# Altium PCB CO2_Metar_PCB.PcbDoc
Units mil, origin at the board's own origin, x right, y up, seen from the top; angles counter-clockwise.
Board outline 3150 x 1100 mil, 4 copper layers (Top Layer, GND, 3.3V, Bottom Layer), stack 30.634 mil thick; 40 components, 32 nets, 207 pads, 28 vias.
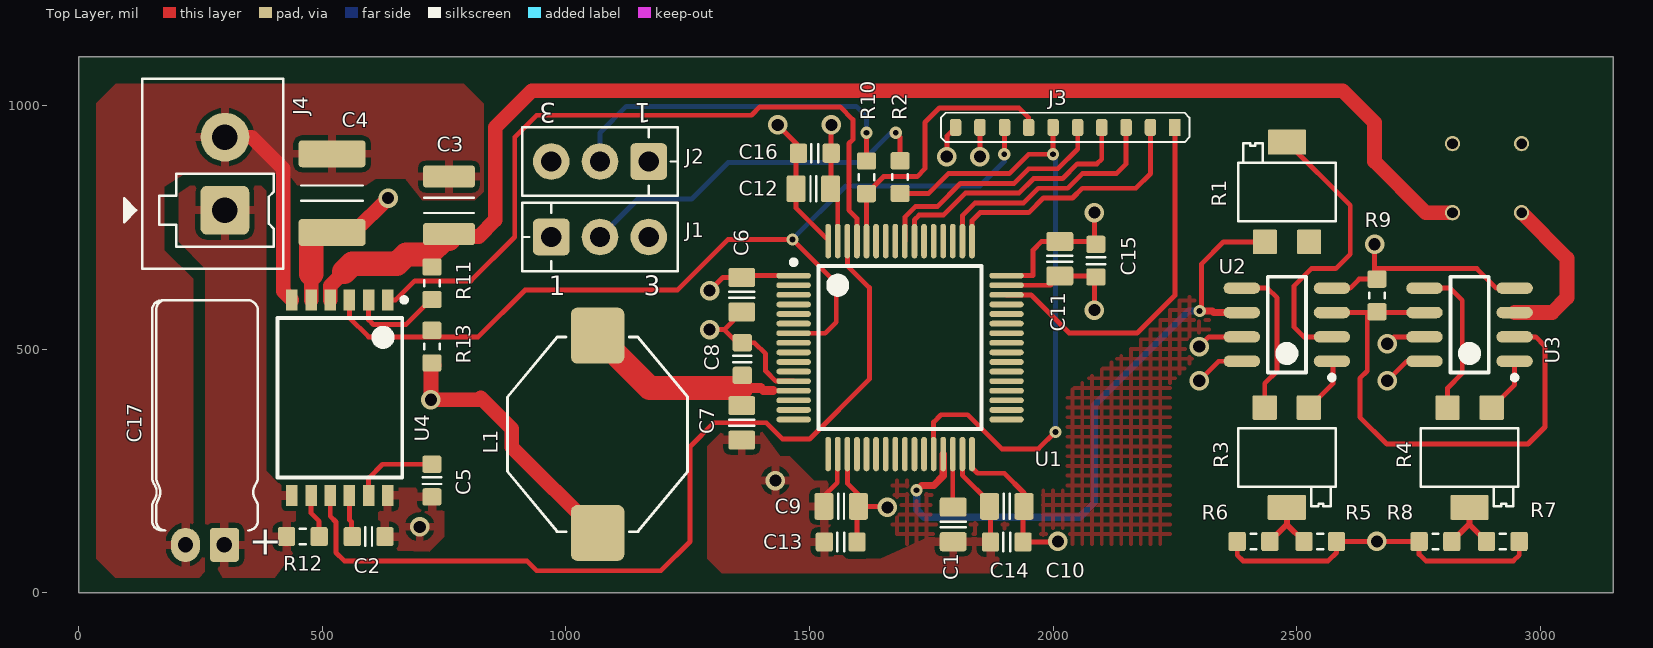
[diagram p0: Top Layer view]
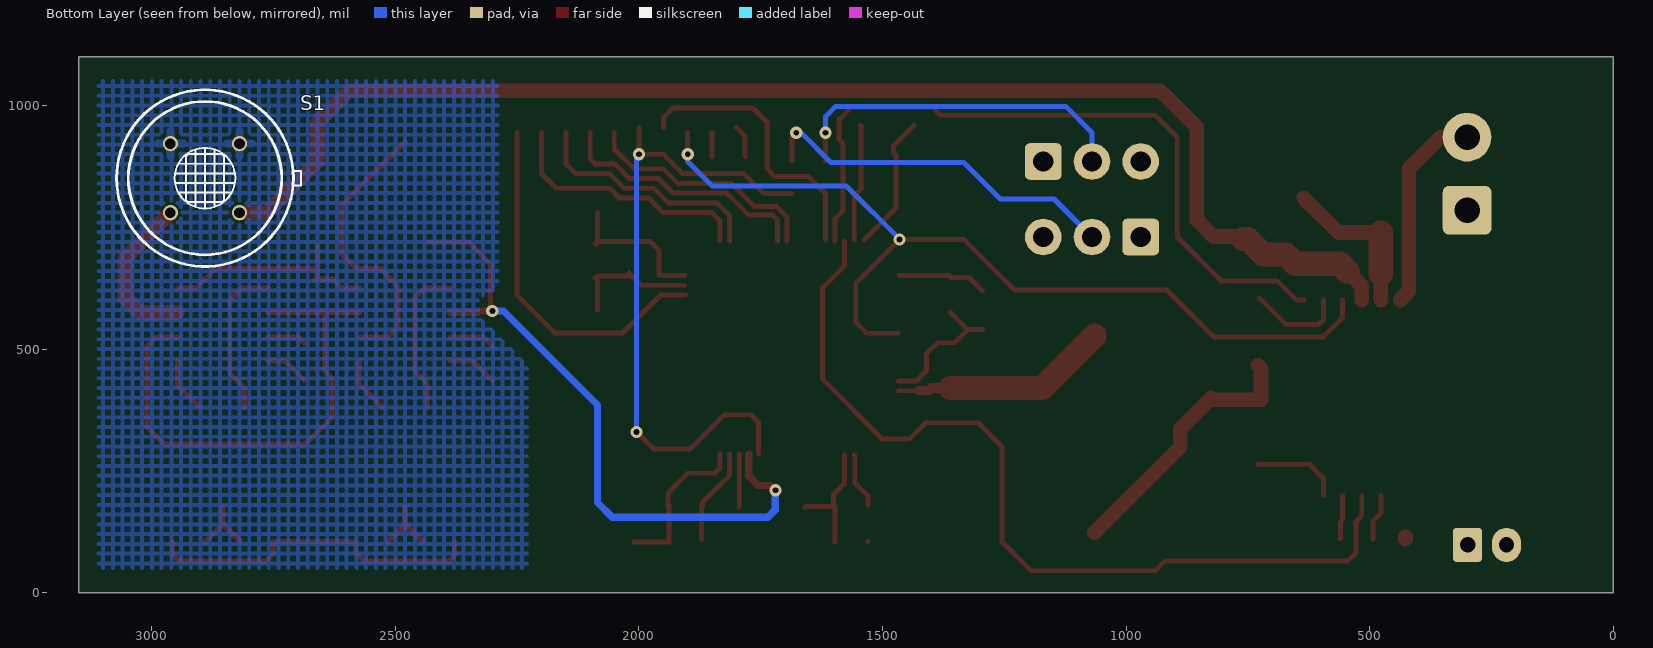
[diagram p1: Bottom Layer view, seen from below]
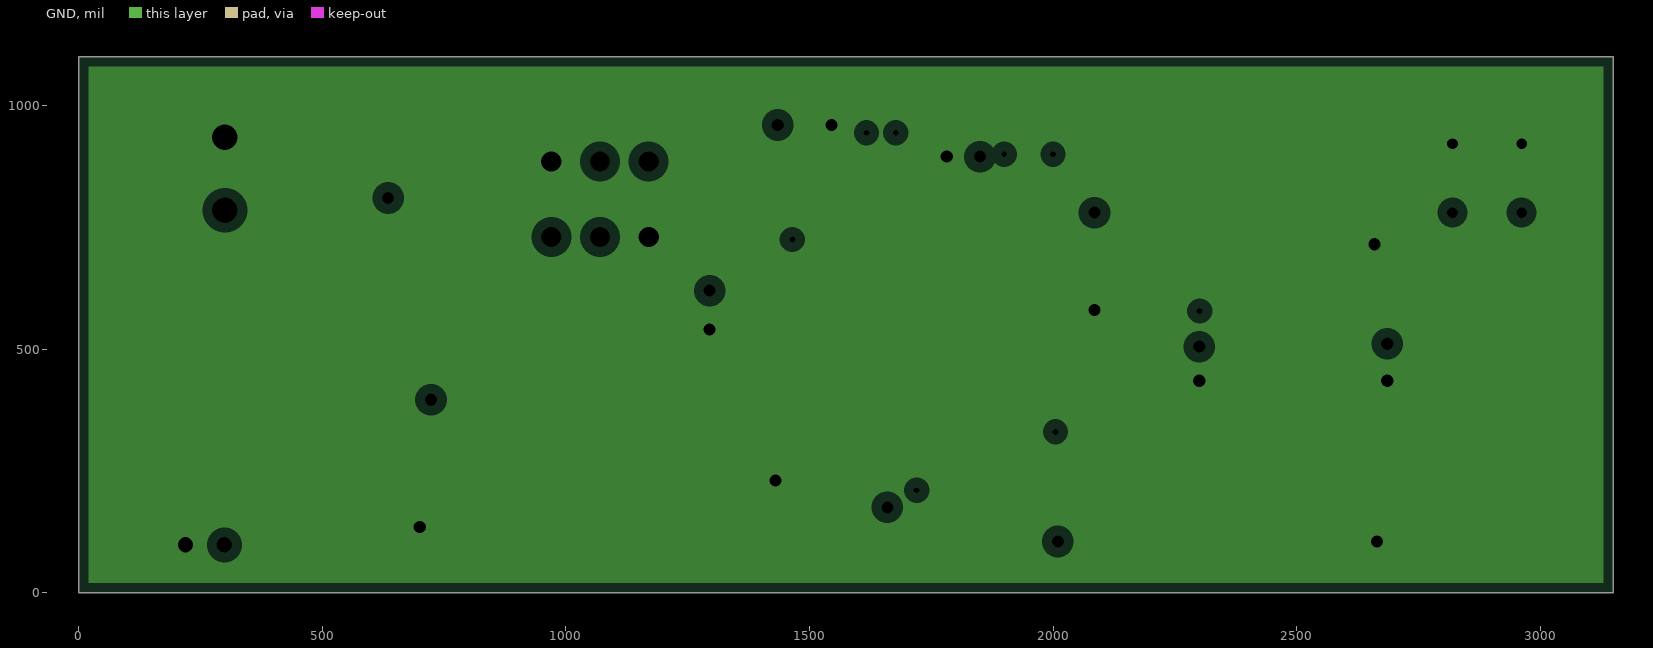
[diagram p2: GND, clearances drawn from the general rule]
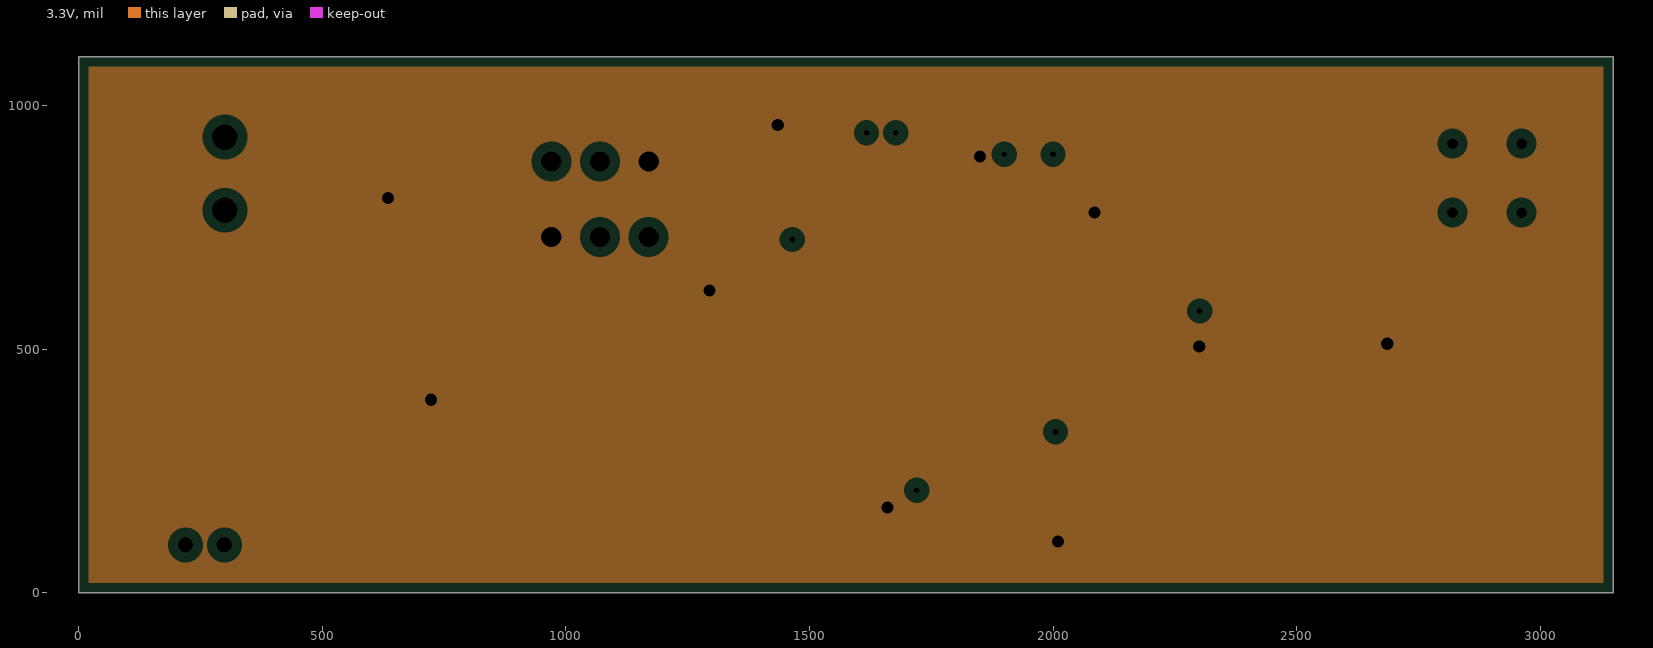
[diagram p3: 3.3V, clearances drawn from the general rule]
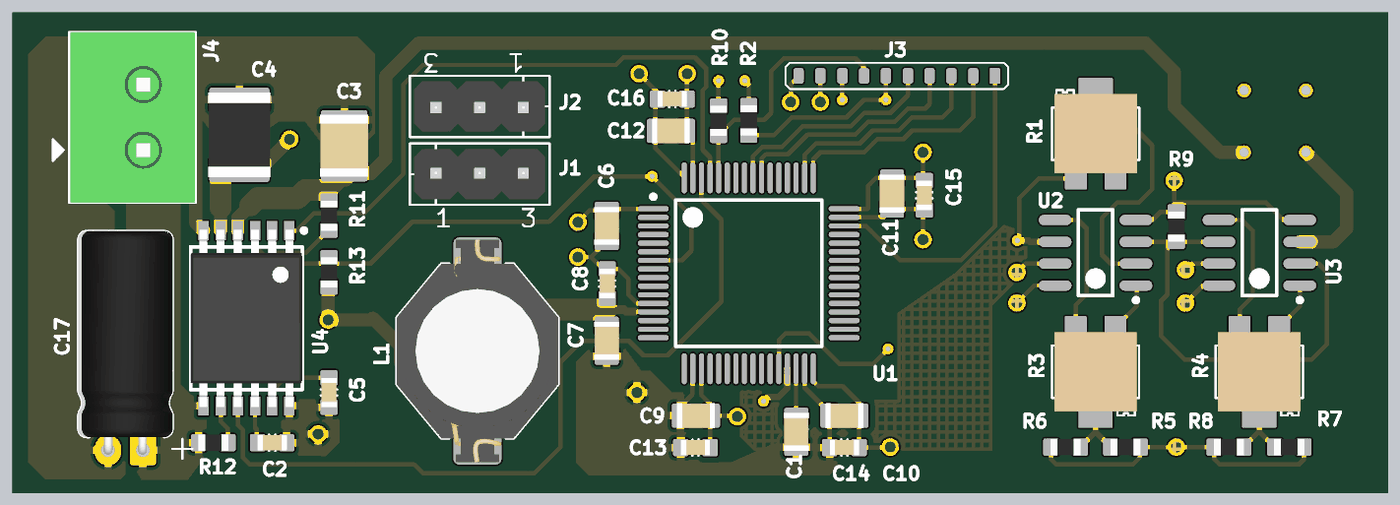
[diagram p4: 3D render of the assembled board from above, using the file's embedded part models]

## Layer stack, top to bottom
Top Solder: solder mask 0.4, Solder Resist, Dk 3.5
Top Layer: signal copper 1.4
Dielectric 1: core 10, FR-4, Dk 4.2
GND: plane copper 1.417, net GND
Dielectric 3: prepreg 5, Dk 4.2
3.3V: plane copper 1.417, net 3.3V
Dielectric 2: core 10, Dk 4.2
Bottom Layer: signal copper 1.4
Bottom Solder: solder mask 0.4, Solder Resist, Dk 3.5

## Board outline
0,0 0,1100 3150,1100 3150,0

## Design rules (kind name [scope] priority, off if disabled: settings)
Clearance [All] p1: gap=5 ignorepadtopadclearanceinfootprint=TRUE except(15: SMDPad-Fill SMDPad-Poly SMDPad-Region)
MinimumSolderMaskSliver [All] p1: minsoldermaskwidth=7
PlaneClearance [All] p1: clearance=20
PlaneConnect [All] p1: planeconnectstyle=Relief reliefexpansion=20 reliefentries=4 reliefconductorwidth=10 reliefairgap=10
PolygonConnect [All] p1: connectstyle=Relief reliefconductorwidth=17 reliefentries=4 polygonreliefangle="90 Angle" airgapwidth=10
RoutingVias [All] p1: holewidth=12 width=25 viastyle="Through Hole" minholewidth=11 minwidth=23 maxholewidth=25 maxwidth=55
SilkToSilkClearance [All] p1: silktosilkclearance=5
SilkToSolderMaskClearance [IsPad] p1: minsilkscreentomaskgap=5 clearancetoexposedcopper=TRUE
SolderMaskExpansion [All] p1: expansion=4
UnpouredPolygon [All] p1: allowunpoured=TRUE allowshelved=TRUE
Width [All] p1: maxlimit=50 minlimit=5 preferedwidth=10 minimp=50.000000 maximp=50.000000 favimp=50.000000
24 further rules are at their usual default settings.

## Components (designator, comment, footprint, x,y, rotation, side; value= is the part's Value field where it differs from the comment)
C1 "approved sub OK" CAPC2012X135N 1795,140 r270 top value=4µ7
C2 "approved sub OK" CAPC1608X90N 595,115 r0 top value=100n
C3 "10µ" CAPC3225X220N 760,795 r90 top
C4 "approved sub OK" CAPC4532X280N 520,820 r90 top value=22µ
C5 "approved sub OK" CAPC1608X90N 725,230 r270 top value=100n
C6 "approved sub OK" CAPC2012X135N 1361,611.43 r270 top value=4µ7
C7 "approved sub OK" CAPC2012X135N 1361,348.57 r270 top value=1µ
C8 "approved sub OK" CAPC1608X90N 1362,479.46 r90 top value=10n
C9 "approved sub OK" CAPC2012X135N 1565,177 r180 top value=1µ
C10 "approved sub OK" CAPC2012X135N 1905,177 r180 top value=1µ
C11 "approved sub OK" CAPC2012X135N 2014,685.43 r270 top value=1µ
C12 "approved sub OK" CAPC2012X135N 1508,829 r0 top value=1µ
C13 "approved sub OK" CAPC1608X90N 1564,104 r180 top value=10n
C14 "approved sub OK" CAPC1608X90N 1905,104 r180 top value=10n
C15 "approved sub OK" CAPC1608X90N 2088,681.46 r270 top value=10n
C16 "approved sub OK" CAPC1608X90N 1511,902 r0 top value=10n
C17 "100µ" CAPAE200P550X1200_FLAT2 259,98 r0 top
J1 "*" 1x3POS_HEADER 1070,730 r90 top value="Single-row, 3 positions"
J2 "*" 1x3POS_HEADER 1070,885 r270 top value="Single-row, 3 positions"
J3 "*" "SWJ-DP connector" 2280,985 r180 top
J4 "*" 2P_PCB_TERM_BLOCK_HDR 300,860 r180 top
L1 "22µH" IND_Coilcraft_DO3316P_SM 1065,325 r90 top value=22µ
R1 "5 Turn" TrimPot_SMD_Bourns_3214G 2480.28,822.36 r270 top value=10K
R2 "Thick Film" RESC1608X55N 1686,853 r270 top value=10K
R3 "5 Turn" TrimPot_SMD_Bourns_3214G 2480,277.36 r90 top value=10K
R4 "5 Turn" TrimPot_SMD_Bourns_3214G 2855,277.36 r90 top value=10K
R5 "Thick Film" RESC1608X55N 2548.46,105 r0 top value=10K
R6 "Thick Film" RESC1608X55N 2411.54,105 r180 top value=10K
R7 "Thick Film" RESC1608X55N 2923.46,105 r0 top value=10K
R8 "Thick Film" RESC1608X55N 2785,105 r180 top value=10K
R9 "Thick Film" RESC1608X55N 2665,610 r90 top value=10K
R10 "Thick Film" RESC1608X55N 1617,852.46 r270 top value=10K
R11 "Thick Film" RESC1608X55N 725,635 r90 top value=4K7
R12 "Thick Film" RESC1608X55N 460,115 r0 top value=1K
R13 "Thick Film" RESC1608X55N 725,505 r270 top value=4K7
S1 "*" CO2_SENSOR 3094.41,1093.82 r270 bottom
U1 "" STM-LQFP64_N 1686,503 r0 top
U2 "" D008_L 2480,550 r180 top
U3 "" D008_L 2855,550 r180 top
U4 "*" PG-DSO-12NTS 536,400 r270 top

## Footprints (in the part's own frame and the unit in brackets; to place one, negate y for a bottom-side part, rotate by r counter-clockwise, add the part's x,y. Pads: shape width x height; smd on the part's side, far side on the other; paste and mask are expansions set on the pad)
1x3POS_HEADER [mil] "Connector Header, Single-row 3-position, 0.100\" pitch"
  rrect25% 75x75 hole 42: 1(0,100)
  round 75 hole 42: 2(0,0) 3(0,-100)
  silkscreen extent -70,-160 70,160, body extent -57,-150 57,150, height 335
2P_PCB_TERM_BLOCK_HDR [mil] "TERM BLOCK HDR 2POS 3.81MM"
  rrect25% 100x100 hole 52: 1(0,75)
  round 100 hole 52: 2(0,-75)
  silkscreen extent -120,-195 207,195, body extent -118,-195 167,195, height 362
CAPAE200P550X1200_FLAT2 [mil]
  round 20 on Mech15: 0(0,0)
  rrect25% 60x70 hole 31.5: 1(40,0)
  oval 60x70 hole 31.5: 2(-40,0)
  silkscreen extent -108,30 108,502, body extent -107,-10 107,502, height 216
CAPC1608X90N [mm] "Chip Capacitor, Body 1.6x0.8mm, EIA 0603, IPC Medium Density"
  round 0.254 on Mech15: 0(0,0)
  rrect25% 0.9x1 smd: 1(-0.85,0) 2(0.85,0)
  Top Layer pour cut-out: -0.6,0.5 -0.4,0.7 0.4,0.7 0.6,0.5 0.6,-0.5 0.4,-0.7 -0.4,-0.7 -0.6,-0.5
  silkscreen extent -0.18,-0.48 0.18,0.48, body extent -0.85,-0.45 0.85,0.45, height 0.89
CAPC2012X135N [mm] "Chip Capacitor, Body 2.0x1.2mm, EIA 0805, IPC Medium Density"
  round 0.254 on Mech15: 0(0,0)
  rrect25% 1x1.4 smd: 1(-0.9,0) 2(0.9,0)
  Top Layer pour cut-out: -0.675,0.7 -0.475,0.9 0.475,0.9 0.675,0.7 0.675,-0.7 0.475,-0.9 -0.475,-0.9 -0.675,-0.7
  silkscreen extent -0.15,-0.65 0.15,0.65, body extent -1.1,-0.72 1.1,0.73, height 1.34
CAPC3225X220N [mm] "Chip Capacitor, Body 3.2x2.5mm, EIA 1210, IPC Medium Density"
  round 0.508 on Mech15: 0(0,0)
  rrect25% 1.15x2.7 smd: 1(-1.5,0) 2(1.5,0)
  silkscreen extent -0.4,-1.3 0.4,1.3, body extent -1.8,-1.4 1.8,1.4, height 2.19
CAPC4532X280N [mm] "Chip Capacitor, Body 4.5x3.2mm, 1812, IPC Medium Density"
  round 0.508 on Mech15: 0(0,0)
  rrect25% 1.4x3.5 smd: 1(-2.05,0) 2(2.05,0)
  silkscreen extent -0.4,-1.6 0.4,1.6, body extent -2.45,-1.8 2.45,1.8, height 2.79
CO2_SENSOR [mm] "4 pin package for TGS4161 sensor"
  round 0.8 hole 0.55: 1(7.971,6.97) 2(7.971,3.37) 3(4.371,3.37) 4(4.371,6.97)
  silkscreen extent 1.56,0.56 10.78,10.17, body extent 1.57,0.57 10.77,10.17, height 12.46
D008_L [mm] "SOIC, 8-Leads, Body 4.9x3.9mm, Pitch 1.27mm, IPC High Density"
  oval 1.9x0.6 smd: 1(-2.35,1.905) 2(-2.35,0.635) 3(-2.35,-0.635) 4(-2.35,-1.905) 5(2.35,-1.905) 6(2.35,-0.635) 7(2.35,0.635) 8(2.35,1.905)
  silkscreen extent -2.48,-2.5 1,2.88, body extent -2,-2.5 2,2.5, height 1.75
IND_Coilcraft_DO3316P_SM [mil] "Wire-wound Power Inductor, 2-Leads, Body 12.95x9.4mm"
  round 20 on Mech15: 0(0,0)
  rrect25% 115x110 smd: 1(-202.5,0) 2(202.5,0)
  silkscreen extent -200,-185 200,185, body extent -255,-185 255,185, height 172
PG-DSO-12NTS [mm]
  rect 1.1x0.6 smd: 1(-5.1,2.5) 2(-5.1,1.5) 3(-5.1,0.5) 4(-5.1,-0.5) 5(-5.1,-1.5) 6(-5.1,-2.5) 7(5.1,-2.5) 8(5.1,-1.5) 9(5.1,-0.5) 10(5.1,0.5) 11(5.1,1.5) 12(5.1,2.5)
  silkscreen extent -5.22,-3.25 4.15,3.48, body extent -5.15,-3.25 5.15,3.25, height 2.6
RESC1608X55N [mm] "Chip Resistor, Body 1.6x0.8mm, EIA 0603, IPC Medium Density"
  round 0.254 on Mech15: 0(0,0)
  rrect25% 0.9x1 smd: 1(-0.85,0) 2(0.85,0)
  Top Layer pour cut-out: -0.6,0.5 -0.4,0.7 0.4,0.7 0.6,0.5 0.6,-0.5 0.4,-0.7 -0.4,-0.7 -0.6,-0.5
  silkscreen extent -0.15,-0.41 0.15,0.41, body extent -0.87,-0.47 0.88,0.48, height 0.54
STM-LQFP64_N [mm] "Thin QFP, 64-Leads, Body 10x10mm, Pitch 0.5mm, IPC Medium Density"
  oval 1.8x0.3 smd: 1(-5.55,3.75) 2(-5.55,3.25) 3(-5.55,2.75) 4(-5.55,2.25) 5(-5.55,1.75) 6(-5.55,1.25) 7(-5.55,0.75) 8(-5.55,0.25) 9(-5.55,-0.25) 10(-5.55,-0.75) 11(-5.55,-1.25) 12(-5.55,-1.75) 13(-5.55,-2.25) 14(-5.55,-2.75) 15(-5.55,-3.25) 16(-5.55,-3.75) 33(5.55,-3.75) 34(5.55,-3.25) 35(5.55,-2.75) 36(5.55,-2.25) 37(5.55,-1.75) 38(5.55,-1.25) 39(5.55,-0.75) 40(5.55,-0.25) 41(5.55,0.25) 42(5.55,0.75) 43(5.55,1.25) 44(5.55,1.75) 45(5.55,2.25) 46(5.55,2.75) 47(5.55,3.25) 48(5.55,3.75)
  oval 0.3x1.8 smd: 17(-3.75,-5.55) 18(-3.25,-5.55) 19(-2.75,-5.55) 20(-2.25,-5.55) 21(-1.75,-5.55) 22(-1.25,-5.55) 23(-0.75,-5.55) 24(-0.25,-5.55) 25(0.25,-5.55) 26(0.75,-5.55) 27(1.25,-5.55) 28(1.75,-5.55) 29(2.25,-5.55) 30(2.75,-5.55) 31(3.25,-5.55) 32(3.75,-5.55) 49(3.75,5.55) 50(3.25,5.55) 51(2.75,5.55) 52(2.25,5.55) 53(1.75,5.55) 54(1.25,5.55) 55(0.75,5.55) 56(0.25,5.55) 57(-0.25,5.55) 58(-0.75,5.55) 59(-1.25,5.55) 60(-1.75,5.55) 61(-2.25,5.55) 62(-2.75,5.55) 63(-3.25,5.55) 64(-3.75,5.55)
  silkscreen extent -5.67,-4.25 4.25,4.57, body extent -5,-5 5,5, height 1.6
"SWJ-DP connector" [mm] "10 pin SWJ-DP PCB connector"
  rrect8% 0.6x0.9 smd: 1(0.762,0.762)
  rrect50% 0.6x0.9 smd: 2(2.032,0.762) 3(3.302,0.762) 4(4.572,0.762) 5(5.826,0.762) 6(7.112,0.762) 7(8.382,0.762) 8(9.636,0.762) 9(10.922,0.762) 10(12.192,0.762)
  silkscreen extent 0,0 12.95,1.52
TrimPot_SMD_Bourns_3214G [mm] "Bourns- 3214G - TRIMMER"
  rrect10% 1.27x1.27 smd: 1(2.6,1.15) 3(2.6,-1.15)
  rrect10% 1.3x2 smd: 2(-2.6,0)
  silkscreen extent -2.54,-2.54 1.52,2.54, body extent -3,-2.4 3,2.4, height 3.9

## Part data
C1 C6: library part CAPC_4u7_0805, "Capacitor SMD Cer 4.7uF 10% 16V X5R 0805", Manufacturer 1="Taiyo Yuden", Manufacturer 2="Samsung Electro-Mechanics America, Inc", Manufacturer 3=Kemet, Manufacturer 4="Murata Electronics North America", Manufacturer 5="TDK Corporation", Manufacturer Part Number 1=EMK212BJ475KG-T, Manufacturer Part Number 2=CL21A475KOFNNNE, Manufacturer Part Number 3=C0805C475K4PACTU, Manufacturer Part Number 4=GRM21BR61C475MA88L, Manufacturer Part Number 5=C2012X5R1C475K125AC, Operating Temperature="-55°C ~ 85°C", Package / Case="0805 (2012 Metric)", Ratings="16V; X5R", Supplier Part Number 1=587-1294-1-ND, Tolerance=±10%, ComponentLink1Description=http://www.yuden.co.jp/productdata/catalog/en/mlcc01_e.pdf, ComponentLink1URL=http://www.yuden.co.jp/productdata/catalog/en/mlcc01_e.pdf, ComponentLink2Description=http://www.samsungsem.com/servlet/FileDownload?type=spec&file=CL21A475KOFNNNE.pdf, ComponentLink2URL=http://www.samsungsem.com/servlet/FileDownload?type=spec&file=CL21A475KOFNNNE.pdf, ComponentLink3Description=http://capacitoredge.kemet.com/capedge2/DataSheet?pn=C0805C475K4PACTU, ComponentLink3URL=http://capacitoredge.kemet.com/capedge2/DataSheet?pn=C0805C475K4PACTU, ComponentLink4Description=http://psearch.murata.com/capacitor/product/GRM21BR61C475MA88#.pdf, ComponentLink4URL=http://psearch.murata.com/capacitor/product/GRM21BR61C475MA88#.pdf, ComponentLink5Description=http://product.tdk.com/capacitor/mlcc/en/documents/mlcc_commercial_general_en.pdf, ComponentLink5URL=http://product.tdk.com/capacitor/mlcc/en/documents/mlcc_commercial_general_en.pdf, Material=ceramic, RoHS 1="RoHS Compliant", RoHS 2="RoHS Compliant", RoHS 3="RoHS Compliant", RoHS 4="RoHS Compliant", RoHS 5="RoHS Compliant", SCDType=spec, Size / Dimension="0.079\" L x 0.049\" W (2.00mm x 1.25mm)", Supplier 1=Digi-Key, Supplier 2=Digi-Key, Supplier 3=Digi-Key, Supplier 4=Digi-Key, Supplier 5=Digi-Key, Supplier Part Number 2=1276-1065-1-ND, Supplier Part Number 3=399-8101-1-ND, Supplier Part Number 4=490-7215-1-ND, Supplier Part Number 5=445-7640-1-ND, Thickness (Max)="0.053\" (1.35mm)"
C2 C5: library part CAPC_100n_0603_X7R_50V_10%, "Capacitor SMD Cer 100nF 10% 50V X7R 0603", Manufacturer 1="AVX Corporation", Manufacturer 2="TDK Corporation", Manufacturer Part Number 1=06035C104KAT2A, Manufacturer Part Number 2=C1608X7R1H104K, Package / Case="0603 (1608 Metric)", Ratings="50V; X7R", Supplier Part Number 1=478-5052-1-ND, Tolerance=±10%, ComponentLink1Description=http://www.avx.com/docs/Catalogs/cx7r.pdf, ComponentLink1URL=http://www.avx.com/docs/Catalogs/cx7r.pdf, ComponentLink2Description=http://product.tdk.com/capacitor/mlcc/en/documents/mlcc_commercial_general_en.pdf, ComponentLink2URL=http://product.tdk.com/capacitor/mlcc/en/documents/mlcc_commercial_general_en.pdf, Material=ceramic, SCDType=spec, Supplier 1=Digi-Key, Supplier 2=Digi-Key, Supplier Part Number 2=445-1314-1-ND
C3: library part CAPC_10u_1210_50V, "Capacitor SMD Cer 10uF 20% 16V X5R 1210", Manufacturer 1="Taiyo Yuden", Manufacturer Part Number 1=UMK325BJ106MM-T, Package / Case="1210 (3225 Metric)", Ratings="50V; X5R", Supplier Part Number 1=587-2225-1-ND, Tolerance=±20%, Material=ceramic, SCDType=spec, Size / Dimension="0.126\" L x 0.098\" W (3.20mm x 2.50mm)", Supplier 1=Digi-Key
C4: library part CAPC_22u_1812_25V, "Capacitor SMD Cer 22uF 20% 25V X5R 1812", Manufacturer 1="TDK Corporation", Manufacturer Part Number 1=C4532X5R1E226M, Package / Case="1812 (4532 metric)", Ratings="25V; X5R", Supplier Part Number 1=445-1444-1-ND, Tolerance=±20%, Material=ceramic, SCDType=undef, Supplier 1=Digi-Key
C7 C9 C10 C11 C12: library part CAPC_1u_0805_X7R_16V_10%, "Capacitor SMD Cer 1uF 10% 16V X7R 0805", Manufacturer 1=Yageo, Manufacturer 2=Kemet, Manufacturer 3="Samsung Electro-Mechanics America, Inc", Manufacturer 4="TDK Corporation", Manufacturer Part Number 1=CC0805KKX7R7BB105, Manufacturer Part Number 2=C0805C105K4RACTU, Manufacturer Part Number 3=CL21B105KOFNNNE, Manufacturer Part Number 4=C2012X7R1C105K125AA, Package / Case="0805 (2012 metric)", Ratings="16V; X7R", Supplier Part Number 1=311-1365-6-ND, Temperature Coefficient=X7R, Tolerance=±10%, ComponentLink1Description=http://www.yageo.com/documents/recent/UPY-GPHC_X7R_6.3V-to-50V_8.pdf, ComponentLink1URL=http://www.yageo.com/documents/recent/UPY-GPHC_X7R_6.3V-to-50V_8.pdf, ComponentLink2Description=http://www.kemet.com/datasheets&C0805C105K4RACTU, ComponentLink2URL=http://www.kemet.com/datasheets&C0805C105K4RACTU, ComponentLink3Description=http://www.samsungsem.com/servlet/FileDownload?type=spec&file=CL21B105KOFNNNE.pdf, ComponentLink3URL=http://www.samsungsem.com/servlet/FileDownload?type=spec&file=CL21B105KOFNNNE.pdf, ComponentLink4Description=http://product.tdk.com/capacitor/mlcc/en/documents/mlcc_commercial_general_en.pdf, ComponentLink4URL=http://product.tdk.com/capacitor/mlcc/en/documents/mlcc_commercial_general_en.pdf, Material=ceramic, RoHS 1="RoHS Compliant", RoHS 2="RoHS Compliant", RoHS 3="RoHS Compliant", RoHS 4="RoHS Compliant", SCDType=spec, Supplier 1=Digi-Key, Supplier 2=Digi-Key, Supplier 3=Digi-Key, Supplier 4=Digi-Key, Supplier Part Number 2=399-1284-6-ND, Supplier Part Number 3=1276-1026-6-ND, Supplier Part Number 4=445-1358-6-ND
C8 C13 C14 C15 C16: library part CAPC_10n_0603_X7R_50V_10%, "Capacitor SMD Cer 10nF 10% 50V X7R 0603", Manufacturer 1="TDK Corporation", Manufacturer 2="AVX Corporation", Manufacturer Part Number 1=C1608X7R1H103K, Manufacturer Part Number 2=06035C103KAT2A, Package / Case="0603 (1608 metric)", Ratings="50V; X7R", Supplier Part Number 1=445-1311-1-ND, Tolerance=±10%, ComponentLink1Description=http://product.tdk.com/capacitor/mlcc/en/documents/mlcc_commercial_general_en.pdf, ComponentLink1URL=http://product.tdk.com/capacitor/mlcc/en/documents/mlcc_commercial_general_en.pdf, ComponentLink2Description=http://www.avx.com/docs/Catalogs/cx7r.pdf, ComponentLink2URL=http://www.avx.com/docs/Catalogs/cx7r.pdf, Material=ceramic, SCDType=spec, Supplier 1=Digi-Key, Supplier 2=Digi-Key, Supplier Part Number 2=478-1227-1-ND
C17: library part CAPE_100u_16V_THD, "Capacitor THD Electrolytic 100uF 20% 16V Radial", Manufacturer="Panasonic - ECG", Manufacturer Part Number=ECA-1CM101, Package / Case="Radial - Through hole", Ratings=16V, Supplier Part Number 1=P5138-ND, Tolerance=±20%, Material="Aluminum Electrolytic", SCDType=spec, Supplier 1=Digi-Key
J1 J2: library part CONN_HEADER_1x3P_0.100in, "Pin Header, THT, Single-row, 2.54mm pitch", Manufacturer 1=3M, Manufacturer Part Number 1=929647-09-36-I, Package / Case="Pin header; 2.54mm pitch", Supplier Part Number 1=929647-09-36-ND, Category=Connectors, Mounting Type="Through Hole", Pitch="0.100\" (2.54mm)", QtyOverride=0.1, SCDType=undef, Supplier 1=Digi-Key, Terminal Block Type="Header, Male Pins, Single"
J3: library part "SWJ-Debug Port", "10 pin Serial Wire JTAG Debug Port"
J4: library part 2P_TERM_BLOCK_HEADER, "Terminal Block THT 2-position header 3.81mm pitch", Manufacturer 1="TE Connectivity", Manufacturer Part Number 1=284517-2, Package / Case="Header; 3.81mm pitch", Supplier Part Number 1=A98410-ND, Voltage=300V, Category=Connectors, Mating Connector=284507-2, Mounting Type="Through Hole", Pitch="0.150\" (3.81mm)", Positions Per Level=2, SCDType=undef, Supplier 1=Digi-Key, Terminal Block Type="Header, Male Pins, Right-angle, Shrouded (4 Side)"
L1: library part INDC_22u_DO3316P-223, "Inductor Power SMD 22µH", Manufacturer 1=Coilcraft, Manufacturer Part Number 1=DO3316P-223KL, Package / Case=12.95x9.4mm, Ratings="2.3 Adc", Tolerance=±10%, SCDType=spec
R1 R3 R4: library part RES_TRIMMER_10K_5T_SMD, "Trimmer SMD 10K 250mW 5-turn Side-adjust", Manufacturer 1="Bourns Inc.", Manufacturer Part Number 1=3214G-1-103E, Ratings="5 turn variable cermet", Supplier Part Number 1=3214G-1-103ECT-ND, Tolerance=10%, Number of Turns=5, SCDType=spec, Supplier 1=Digi-Key
R2 R10: library part RES_10K_0603_5%, "Resistor SMD chip 10k Ohm 0.1W 5% 0603", Manufacturer 1=Yageo, Manufacturer 2="Vishay Dale", Manufacturer Part Number 1=RC0603JR-0710KL, Manufacturer Part Number 2=CRCW060310K0JNEA, Package / Case="0603 (1608 metric)", Ratings="1/10 W", Supplier Part Number 1=311-10KGRCT-ND, Tolerance=±5%, ComponentLink1Description=http://www.yageo.com/documents/recent/PYu-RC0603_51_RoHS_L_4.pdf, ComponentLink1URL=http://www.yageo.com/documents/recent/PYu-RC0603_51_RoHS_L_4.pdf, ComponentLink2Description=http://www.vishay.com/doc?20035, ComponentLink2URL=http://www.vishay.com/doc?20035, Material="Thick Film", SCDType=spec, Supplier 1=Digi-Key, Supplier 2=Digi-Key, Supplier Part Number 2=541-10KGCT-ND
R5 R6 R7 R8 R9: library part RES_10K_0603_1%, "Resistor SMD chip 10k Ohm 0.1W 1% 0603", Manufacturer 1=Yageo, Manufacturer Part Number 1=RC0603FR-0710KL, Package / Case="0603 (1608 Metric)", Ratings=1/10W, Supplier Part Number 1=311-10.0KHRCT-ND, Tolerance=±1%, SCDType=spec, Supplier 1=Digi-Key
R11 R13: library part RES_4K7_0603_5%, "Resistor SMD chip 4.7k Ohm 0.1W 5% 0603", Manufacturer 1=Vishay/Dale, Manufacturer Part Number 1=CRCW06034K70JNEA, Package / Case="0603 (1608 metric)", Ratings="1/10 W", Supplier Part Number 1=541-4.7KGCT-ND, Tolerance=±5%, Material="Thick Film", SCDType=spec, Supplier 1=Digi-Key
R12: library part RES_1K_0603_5%, "Resistor SMD chip 1k Ohm 0.1W 5% 0603", Manufacturer 1=Yageo, Manufacturer 2="Vishay Dale", Manufacturer Part Number 1=RC0603JR-071KL, Manufacturer Part Number 2=CRCW06031K00JNEA, Package / Case="0603 (1608 metric)", Ratings="1/10 W", Supplier Part Number 1=311-1.0KGRCT-ND, Tolerance=±5%, ComponentLink1Description=http://www.yageo.com/documents/recent/PYu-RC0603_51_RoHS_L_4.pdf, ComponentLink1URL=http://www.yageo.com/documents/recent/PYu-RC0603_51_RoHS_L_4.pdf, ComponentLink2Description=http://www.vishay.com/doc?20008, ComponentLink2URL=http://www.vishay.com/doc?20008, Material="Thick Film", SCDType=spec, Supplier 1=Digi-Key, Supplier 2=Digi-Key, Supplier Part Number 2=541-1.0KGCT-ND
S1: library part TGS4161, "Solid electrolyte type Carbon Dioxide sensor"
U1: library part STM32F401RBT6, "ARM Cortex-M4 32-bit MCU+FPU, 105 DMIPS, 128 kB Flash, 64 kB Internal RAM, 48 I/Os, 64-pin LQFP, -40 to 85 degC, Tray", I/Os (High Current)=48, Manufacturer=STMicroelectronics, Operating Frequency(F) (Processor speed) (MHz)=84, Supplier Part Number 1=19X6220, Supply Voltage(Vcc) max (V)=3.6, Supply Voltage(Vcc) min (V)=1.8, ComponentLink1Description="Manufacturer URL", ComponentLink1URL=http://www.st.com/web/en/home.html, ComponentLink2Description=Datasheet, ComponentLink2URL=http://www.st.com/st-web-ui/static/active/en/resource/technical/document/data_brief/DM00071938.pdf, ComponentLink3Description="Package Specification", ComponentLink3URL=http://www.st.com/st-web-ui/static/active/en/resource/technical/document/datasheet/DM00037051.pdf, Core="ARM Cortex-M4", DatasheetVersion="Rev. 1", FLASH Size (Prog) (kB)=128, Internal RAM Size (kB)=64, Mounting Technology="Surface Mount", PackageDescription="64-Pin Low Profile Quad Flat Package, 10 x 10 mm Body, 0.5 mm Pitch", PackageReference=LQFP64, PackageVersion="Rev. 4, 06/2013", Packing=Tray, PartNumber=STM32F401RBT6, Supplier 1=Newark, Supplier 2=Mouser, Supplier Part Number 2=511-STM32F401RBT6
U2 U3: library part TLC271AID, "LinCMOS Programmable Low-Power Operational Amplifier", Code_IPC=SOIC127P600-8, ComponentLink1Description="Manufacturer Link", ComponentLink1URL=http://www.ti.com/, ComponentLink2Description=Datasheet, ComponentLink2URL=http://www-s.ti.com/sc/ds/tlc271.pdf, DatasheetVersion=Mar-1989, LatestRevisionDate=13-Apr-2006, LatestRevisionNote="IPC-7351 Footprint Added.", PackageDescription="8-Pin Small Outline Integrated Circuit 1.27 mm Pitch", PackageReference=D008, PackageVersion=Jan-1998, Published=15-Apr-2002, Publisher="Altium Limited"
U4: library part TLE4473-GV53, "Dual Low Drop Voltage Regulator"

## Via types
v1: diameter 40, hole 25, Top Layer to 3.3V, 10 vias
v2: diameter 40, hole 25, Top Layer to GND, 10 vias
v3: diameter 25, hole 12, Top Layer to Bottom Layer, 8 vias

## Nets (pads, with @x,y where several pads share a name; then routed paths per layer and width w, separated by ;. In a path a pad name is that pad's centre, name@x,y a point inside that pad or via, vN(x,y) a via of type N, cw(c..) or ccw(c..) an arc to the next point about the centre after c; other vN are vias at no path point)
3.3V: C4.1 C6.1 C9.1 C10.1 C11.1 C12.1 C13.1 C14.1 C15.1 C16.1 J1.1 J2.1 J3.9 L1.1 R13.2 U1.1 U1.19 U1.32 U1.48 U1.64 U2.7 U3.7 U4.5 | length 2462.7
  Top Layer w10: v1(1295,620) 1321.87,646.87 1360,646.87 1363.77,650.64 U1.1@1465.53,650.64 ; v1(1435,960) 1477.54,917.46 C16.1 1472.57,897.03 1472.57,789.27 U1.64@1538.36,723.47 ; U1.19@1577.73,282.53 1577.73,224.27 1600.43,201.57 1600.43,180 1597.46,177.03 C13.1 ; C9.1 1658,177 v1(1660,175) ; U1.32 1833.64,256.36 1845,245 1900,245 1940.43,204.57 C10.1@1940.43,180 ; v1(1850,895) J3.9@1850,945 ; U1.48@1906.47,650.64 1959.14,650.64 1959.14,703.31 1976.7,720.87 2082.06,720.87 C15.1 2090,716.93 2085,721.93 v1(2085,780) ; C14.1 2009,104 v1(2010,105) ; C14.1@1938.46,110 1938.46,178.03 C10.1@1940.43,180 ; C10.1 C10.1@1940.43,180 ; v1(2300,505) 2320,525 U2.7 ; v1(2686,511) 2700,525 U3.7
  Top Layer w30: U4.5 476.94,654 ; C4.1@476.94,739.29 C4.1 564.29,739.29 v1(635,810) ; R13.2@730,466.54 723,459.54 v1(723,396) 821,396 825,400 888.75,336.25 888.75,298.75 L1.1
  Top Layer w50: 476.94,654 C4.1@476.94,739.29
5V: C3.1 R11.2 S1.1 U4.4 | length 2760.1
  Top Layer w30: U4.4 516.32,629.73 545,658.42 ; C3.1@760,726 764.94,730.94 820.94,730.94 855,765 855,955 930,1030 2595,1030 2660,965 2660,885 2765,780 S1.1
  Top Layer w50: 545,658.42 561.58,675 653,675 672,694 718.05,694 750.05,726 C3.1@760,726
BOOT0: J3.7 R10.2 U1.60 | length 585.4
  Top Layer w10: U1.60@1617.1,723.47 1617,723.57 R10.2 1652,854 1721,854 1737,870 1737,965 1767,995 1930,995 1950,975 J3.7
BOOT1: J3.6 R2.2 U1.28 | length 1339.7
  Top Layer w10: R2.2 1744.54,819.54 1785,860 1910,860 1950,900 v3(2000,900) J3.6 ; U1.28 1754.9,349.9 1770,365 1825,365 1895,295 1970,295 v3(2005,330)
  Bottom Layer w10: v3(2000,900) 2005,895 v3(2005,330)
GND: C1.2 C2.2 C3.2 C4.2 C5.2 C6.2 C7.2 C8.2 C9.2 C10.2 C11.2 C12.2 C13.2 C14.2 C15.2 C16.2 C17.2 J1.3 J2.3 J3.10 J4.2 R5.2 R6.2 R7.2 R8.2 R9.2 S1.3 S1.4 U1.12 U1.18 U1.31 U1.47 U1.63 U2.4 U2.8 U3.4 U3.8 U4.6 U4.12 | length 2992.7
  Top Layer w10: v2(1295,540) 1325,540 ; C6.2 1325,540 ; U1.12 1430.9,434.1 1410,455 1410,490 1387.07,512.93 C8.2 1352.07,512.93 1325,540 ; C13.2@1529.57,104.97 C13.2 ; C9.2@1529.57,180 1529.57,198.09 1557.07,225.6 1557.07,281.55 U1.18@1558.05,282.53 ; v2(1545,960) 1544.46,959.46 C16.2 1544.46,830.03 C12.2 1558.05,814.39 U1.63@1558.05,723.47 ; v2(1782,895) 1782,937 J3.10 ; U1.31 1813.95,241.05 1869.57,185.43 C10.2 ; C14.2@1871.54,110 C10.2@1871.54,177 ; U1.47@1906.47,630.95 1994.95,630.95 C11.2 ; v2(2085,580) 2085,641 2090,646 C15.2 2086,650 C11.2@2020,650 ; v2(2300,435) 2340,475 U2.8 ; R6.2 2378.07,76.93 2390,65 2565,65 2581.93,81.93 R5.2 v2(2665,105) R8.2 2751.54,78.46 2765,65 2945,65 2956.93,76.93 R7.2 ; U2.4 2610,625 2628.46,643.46 R9.2 2660,648.46 2660,665 ; v2(2660,715) 2660,665 ; v2(2686,435) 2726,475 U3.8 ; U3.4 2910,625 2870,665 2660,665 ; C11.2 C11.2@2020,650 ; C11.2 2020,656 C11.2@2020,650
  Top Layer w30: J4.2 355,935 420,870 420,618.36 U4.6
  other v2: 700,135 1430,230
INH2: U1.62 U4.9 | length 1839.5
  Top Layer w10: U4.9 516.32,156.68 528,145 528,82 545,65 920,65 940,45 1195,45 1255,105 1255,300 1303.57,348.57 1411.43,348.57 1445,315 1500,315 1623,438 1623,626 1577.73,671.27 U1.62
JTCK/SWCLK: J3.2 U1.49 | length 533.4
  Top Layer w10: U1.49 1833.64,763.64 1850,780 1950,780 1980,810 2040,810 2060,830 2170,830 2200,860 J3.2@2200,945
JTDI: J3.3 U1.50 | length 497.4
  Top Layer w10: U1.50 1813.95,773.95 1840,800 1940,800 1970,830 2030,830 2060,860 2130,860 2150,880 J3.3@2150,945
JTDO/TRACESWO: J3.4 U1.55 | length 535.1
  Top Layer w10: U1.55 1715.53,765.53 1725,775 1775,775 1820,820 1930,820 1960,850 2020,850 2050,880 2090,880 2100,890 J3.4@2100,945
JTMS/SWDIO: J3.1 U1.46 | length 744.8
  Top Layer w10: U1.46 1954.73,611.27 2033,533 2173,533 2250,610 J3.1@2250,945
NetC2_1: C2.1 U4.10 | length 91.6
  Top Layer w10: U4.10 555.68,149.32 560,145 560,111.54 C2.1@561.54,110
NetC5_1: C5.1 U4.11 | length 182.6
  Top Layer w10: U4.11 595,199.27 595,235 623.46,263.46 C5.1 C5.1@730,263.46
NetC17_1: C17.1 J4.1 R12.1 U4.7 | length 5
  Top Layer w30: R12.1@426.54,110 R12.1
NetJ1_2: J1.2 R2.1 | length 762.9
  Top Layer w10: v3@1677,950 v3(1677,944) 1686,935 R2.1
  Bottom Layer w10: J1.2 1148,808 1258,808 1333,883 1606,883 1667,944 v3(1677,944)
NetJ2_2: J2.2 R10.1 | length 728.1
  Top Layer w10: R10.1 v3(1617,944)
  Bottom Layer w10: J2.2 1070,944 1124,998 1596,998 1617,977 v3(1617,944)
NetR1_2: R1.2 U2.2 | length 596.2
  Top Layer w10: R1.2 2610,795 2610,695 2580,665 2530,665 2495,630 2495,545 2515,525 U2.2
NetR3_1: R3.1 U2.5 | length 316.5
  Top Layer w10: U2.5 2440,625 2460,605 2460,455 2434.72,429.72 R3.1
NetR3_2: R3.2 R5.1 R6.1 | length 134
  Top Layer w12: R6.1 2480,140 ; R3.2 2480,140 ; R5.1 2480,140
NetR3_3: R3.3 U2.1 | length 116.9
  Top Layer w10: R3.3 2575,429.45 2575,472.52 U2.1
NetR4_1: R4.1 U3.5 | length 320.7
  Top Layer w10: U3.5 2815,625 2840,600 2840,450 2809.72,419.72 R4.1
NetR4_2: R4.2 R7.1 R8.1 | length 136.2
  Top Layer w12: R8.1 2855,141.54 ; R4.2 2855,141.54 ; R7.1 2855,140 2855,141.54
NetR4_3: R4.3 U3.1 | length 114.8
  Top Layer w10: R4.3 2947.52,426.97 U3.1
NetR9_1: R9.1 U2.3 U3.2 U3.6 | length 1066.1
  Top Layer w10: U2.3 2645,575 ; U3.6 2666.54,575 R9.1 2663.46,575 2645,575 ; U3.2 2991,525 3010,506 3010,340 2975,305 2685,305 2630,360 2630,440 2645,455 2645,575
NetR11_1: R11.1 U4.2 | length 199.2
  Top Layer w10: U4.2 595.06,559.94 605,550 671.54,550 R11.1@726.54,605
NetR12_2: R12.2 U4.8 | length 96.1
  Top Layer w10: U4.8 476.94,163.06 493.46,146.54 R12.2 R12.2@493.46,110
NetS1_2: S1.2 U3.3 | length 333.5
  Top Layer w30: U3.3 3025,575 3055,605 3055,686.73 S1.2
NJTRST: J3.5 U1.56 | length 496.4
  Top Layer w10: U1.56 1695.84,770.84 1717.5,792.5 1762.5,792.5 1810,840 1920,840 1950,870 2010,870 2050.63,910.63 J3.5@2050.63,945
NRST_uC: J3.8 R13.1 U1.7 U4.3 | length 1910.5
  Top Layer w10: U4.3 555.68,564.32 595,525 820,525 916,621 1229,621 1333,725 v3(1465,725) 1555,635 1555,555 1532.53,532.53 U1.7 ; v3(1900,900) 1900,944.37 J3.8@1900.63,945
  Bottom Layer w10: v3(1465,725) 1575,835 1850,835 1900,885 v3(1900,900)
SCC: R1.3 U1.29 U2.6 | length 1364.7
  Top Layer w10: v3@2305,578 2305,675 2350,720 R1.3 ; 2327,578 2330,575
  Top Layer w15: v3(1720,210) 1730,220 1755,220 1774.58,239.58 U1.29 ; v3(2301,578) 2305,578 2327,578 ; 2330,575 U2.6
  Bottom Layer w15: v3(1720,210) 1720,170 1735,155 2055,155 2085,185 2085,385 2278,578 v3(2301,578)
VCAP1: C1.1 U1.30 | length 110.8
  Top Layer w10: U1.30@1793.29,281.55 U1.30@1794.27,282.53 ; U1.30 U1.30@1794.27,282.53 ; C1.1 1794.27,176.17 U1.30@1794.27,282.53
VDDA: C7.1 C8.1 L1.2 U1.13 | length 449.3
  Top Layer w10: 1425,415 1425.58,414.42 U1.13
  Top Layer w18: 1400,420 1405,415 1425,415
  Top Layer w20: 1360,420 1400,420
  Top Layer w50: L1.2 1172.5,420 1360,420
WI: U1.61 U4.1 | length 1509.2
  Top Layer w10: U4.1 650.79,600.79 690,640 805,640 895,730 895,935 940,980 1381,980 1398,997 1563,997 1589,971 1589,930 1581,922 1581,785 1597.42,768.58 U1.61
pads on no net: C1.0 C2.0 C3.0 C4.0 C5.0 C6.0 C7.0 C8.0 C9.0 C10.0 C11.0 C12.0 C13.0 C14.0 C15.0 C16.0 C17.0 L1.0 R1.1 R2.0 R5.0 R6.0 R7.0 R8.0 R9.0 R10.0 R11.0 R12.0 R13.0 U1.2 U1.3 U1.4 U1.5 U1.6 U1.8 U1.9 U1.10 U1.11 U1.14 U1.15 U1.16 U1.17 U1.20 U1.21 U1.22 U1.23 U1.24 U1.25 U1.26 U1.27 U1.33 U1.34 U1.35 U1.36 U1.37 U1.38 U1.39 U1.40 U1.41 U1.42 U1.43 U1.44 U1.45 U1.51 U1.52 U1.53 U1.54 U1.57 U1.58 U1.59

## Polygon pours and split planes (outlines as drawn)
GND on Top Layer "GND_L01_P024" (solid, pour order 24): 1290,300 1325,335 1400,335 1440,280 1460,280 1510,230 1535,230 1550,207 1550,95 1575,70 1645,70 1743,113.43 1889.25,113.43 1889.25,59.25 1870,40 1320,40 1290,70
GND on Top Layer "GND_L01_P032" (solid, pour order 32): 217.24,860 410,860 430,860 449,836 590,836 610,850 670,850 705,805 813,805 831,823 831,1004 790,1045 76,1045 36,1005 36,70 75,31 247,31 259,43 259,119 235,145.55 235,644 176,703 176,832.94
NetC17_1 on Top Layer "NETC17_1_L01_P030" (solid, pour order 30): 227.5,835 375,835 385,825 385,250 410,225 445,225 445,87.44 402.07,30 296,30 260,90 260,665 205,720 205,820
GND on Top Layer "GND_L01_P012" (solid, pour order 12): 750,215 615.14,215 614.86,86.37 719.33,84.33 750,115
GND on Top Layer "GND_L01_P028" (hatched 90Degree grid 20 track 8, pour order 28): 2160,500 2270,610 2320,593 2320,510 2240,430 2240,100 1700,100 1670,130 1670,230 1710,270 1760,270 1760,210 2030,210 2030,410
GND on Bottom Layer "GND_L04_P026" (hatched 90Degree grid 20 track 8, pour order 26): 3110,1050 3110,50 2230,50 2230,466 2330,566 2330,603.6 2290,627.6 2290,1050
GND on GND (split plane): 3129.9,20.1 20.1,20.1 20.1,1079.9 3129.9,1079.9
3.3V on 3.3V (split plane): 3129.9,20.1 20.1,20.1 20.1,1079.9 3129.9,1079.9

## Text inside footprints (layer, text, board x,y; h text height)
C17: Top Overlay "+" at 349,78 h60
J1: Top Overlay "3" at 1160,610 h40; Top Overlay "1" at 965,610 h40
J2: Top Overlay "3" at 980,1005 h40 r180; Top Overlay "1" at 1175,1005 h40 r180